# EAGLE board PCA9685Shield (EAGLE 7.3.0)
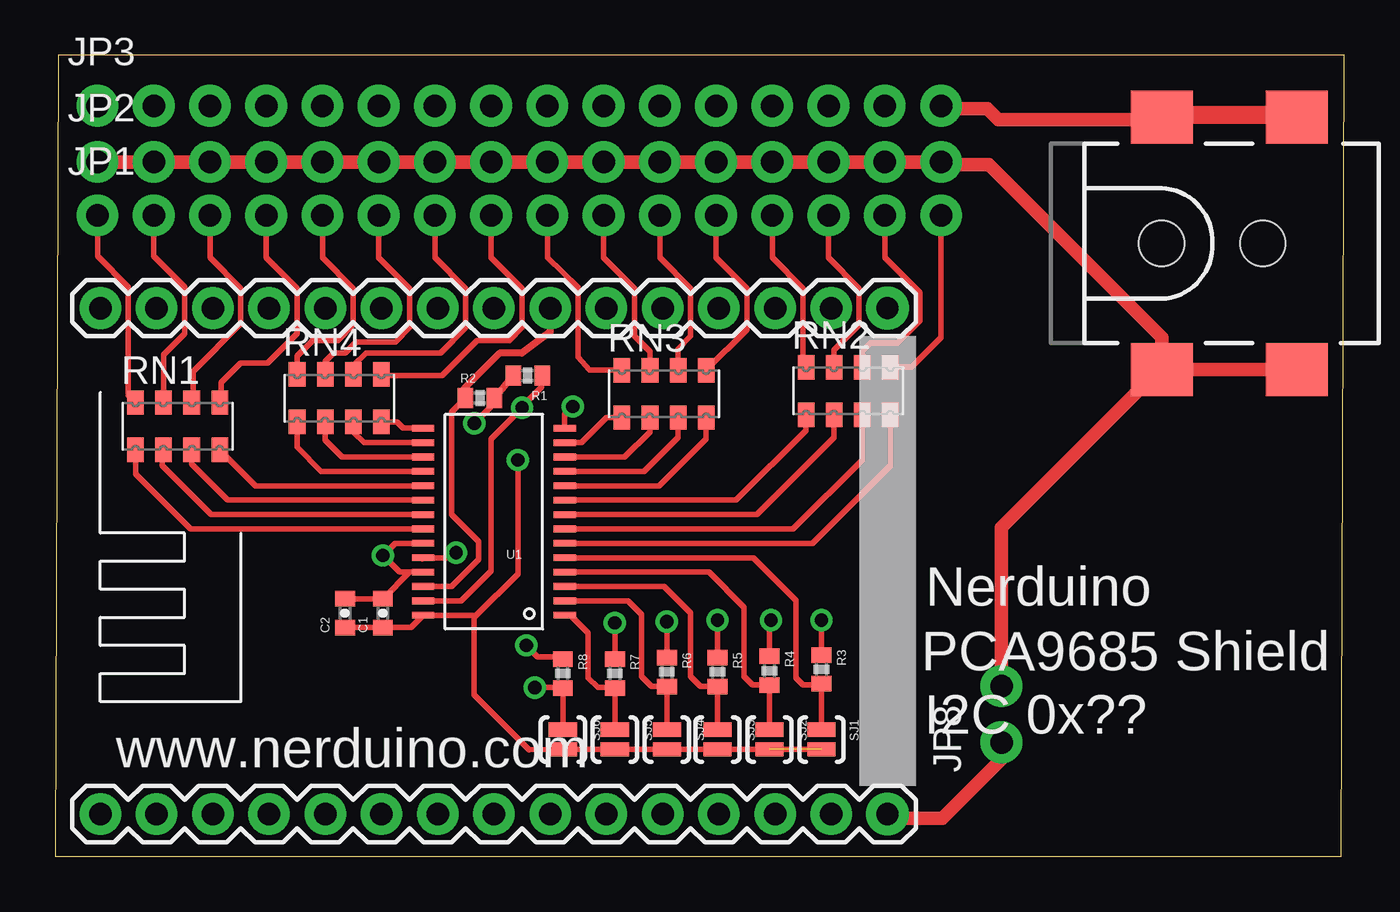
[diagram p0: board, top side]
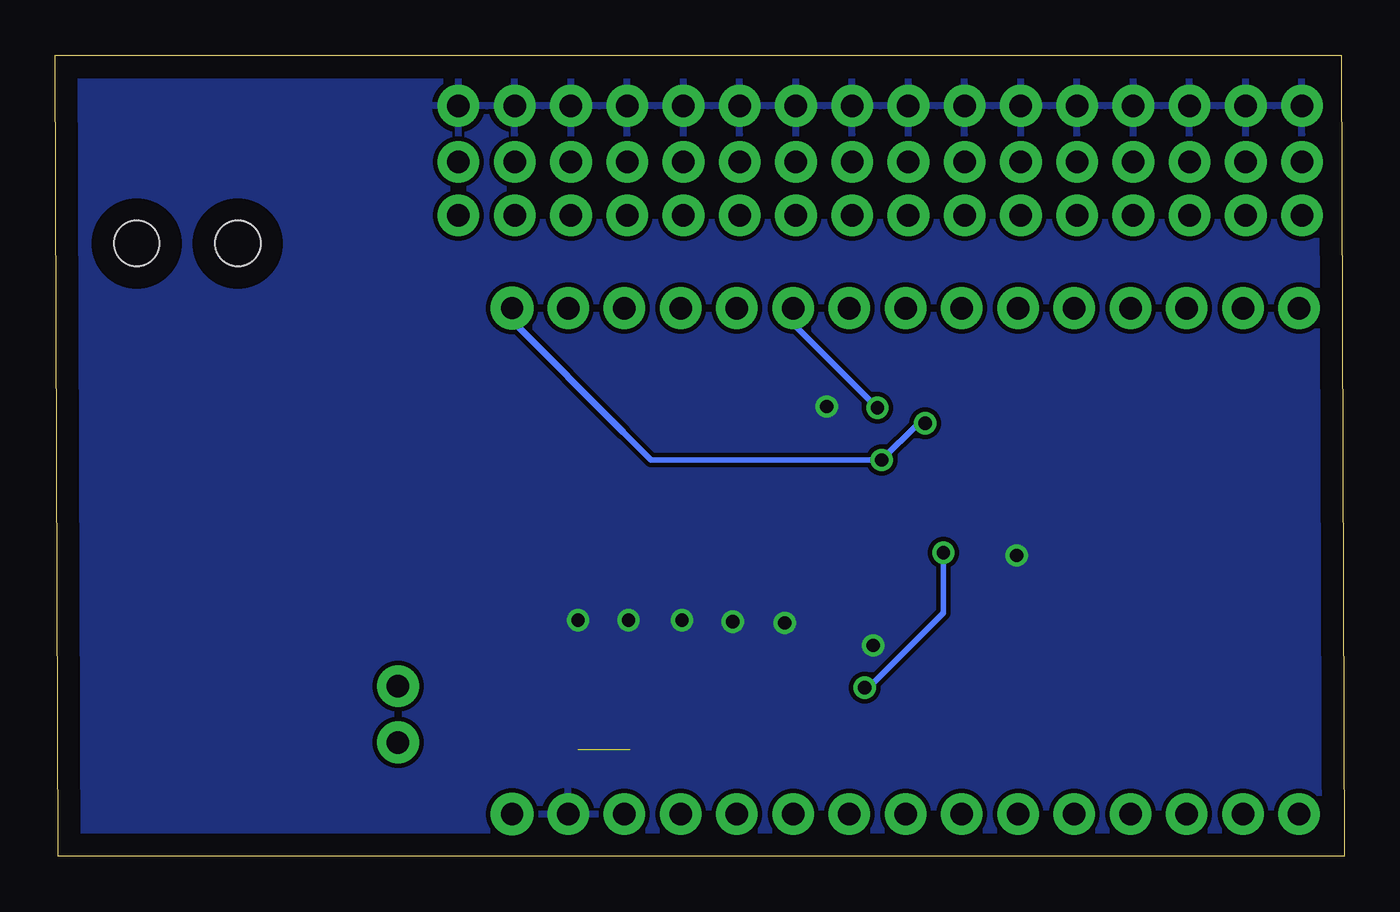
[diagram p1: board, bottom side, seen from below]

Size 58.22 x 36.19 mm. Coordinates in mm from the lower left corner, seen from the top.
Outline: 0,0 58.09,0 58.22,36.19 0.13,36.19 0,0
Copper layers (1*16): Top 0.035mm / dielectric 1.5mm / Bottom 0.035mm
Design rules "default": minimum track width 10mil, minimum drill 24mil, track to track 8mil, track to pad 8mil, pad to pad 8mil, via to via 8mil, smd to smd 8mil, copper to edge 40mil, drill to drill 8mil, minimum pad ring 10mil, minimum via ring 8mil, stop-mask expansion 4mil, vias tented up to drill 0mil, thermal gap 10mil

## Footprints (pad centres in the part's own frame; a part is rotated, then mirrored left to right if it is on the bottom)
0402-CAP = smd 0.7 x 0.9: 1 -0.65,0; 2 0.65,0
1X16_NO_SILK = drill 1.016 pad 1.88: 1 0,0; 2 2.54,0; 3 5.08,0; 4 7.62,0; 5 10.16,0; 6 12.7,0; 7 15.24,0; 8 17.78,0; 9 20.32,0; 10 22.86,0; 11 25.4,0; 12 27.94,0; 13 30.48,0; 14 33.02,0; 15 35.56,0; 16 38.1,0
POWER_JACK_SMD_OVERPASTE_REDBOARD_0603 = smd 2.8 x 2.4: GND 0,-5.7; P$4 6.1,-5.7; VIN0 0,5.7; VIN1 6.1,5.7 | hole 2.032: 0,0; 4.572,0
1X02_NO_SILK = drill 1.016 pad 1.88: 1 0,0; 2 2.54,0
0402-RES = smd 0.7 x 0.9: 1 -0.65,0; 2 0.65,0
EXBS8V = smd 0.75 x 1.1: 1 -1.905,-1.07; 2 -0.635,-1.07; 3 0.635,-1.07; 4 1.905,-1.07; 5 1.905,1.07; 6 0.635,1.07; 7 -0.635,1.07; 8 -1.905,1.07
SJ_2S-NO = smd 0.635 x 1.27: 1 -0.45,0; 2 0.45,0
TSSOP-28_4MM = smd 1 x 0.3: 1 -3.2,4.225; 2 -3.2,3.575; 3 -3.2,2.925; 4 -3.2,2.275; 5 -3.2,1.625; 6 -3.2,0.975; 7 -3.2,0.325; 8 -3.2,-0.325; 9 -3.2,-0.975; 10 -3.2,-1.625; 11 -3.2,-2.275; 12 -3.2,-2.925; 13 -3.2,-3.575; 14 -3.2,-4.225; 15 3.2,-4.225; 16 3.2,-3.575; 17 3.2,-2.925; 18 3.2,-2.275; 19 3.2,-1.625; 20 3.2,-0.975; 21 3.2,-0.325; 22 3.2,0.325; 23 3.2,0.975; 24 3.2,1.625; 25 3.2,2.275; 26 3.2,2.925; 27 3.2,3.575; 28 3.2,4.225
NERDUINO_STACK = drill 1.016 pad 1.88: 1 -17.78,-5.08; 2 -15.24,-5.08; 3 -12.7,-5.08; 4 -10.16,-5.08; 5 -7.62,-5.08; 6 -5.08,-5.08; 7 -2.54,-5.08; 8 0,-5.08; 9 2.54,-5.08; 10 5.08,-5.08; 11 7.62,-5.08; 12 10.16,-5.08; 13 12.7,-5.08; 14 15.24,-5.08; 17 15.24,17.78; 18 12.7,17.78; 19 10.16,17.78; 20 7.62,17.78; 21 5.08,17.78; 22 2.54,17.78; 23 0,17.78; 24 -2.54,17.78; 25 -5.08,17.78; 26 -7.62,17.78; 27 -10.16,17.78; 28 -12.7,17.78; 29 -15.24,17.78; 30 -17.78,17.78 | drill 1 pad 1.93: 15 17.78,-5.08; 16 17.78,17.78

## Placement (x,y rotation side)
C1  0.1uF  [0402-CAP]  14.8,10.99 90 top
C2  1uF  [0402-CAP]  13.08,10.99 90 top
JP1  [1X16_NO_SILK]  1.9,28.96 0 top
JP2  [1X16_NO_SILK]  1.9,31.37 0 top
JP3  [1X16_NO_SILK]  1.9,33.91 0 top
JP7  POWER_JACK1  [POWER_JACK_SMD_OVERPASTE_REDBOARD_0603]  49.97,27.69 0 top
JP8  [1X02_NO_SILK]  42.74,5.14 90 top
R1  4.7k  [0402-RES]  21.34,21.72 180 top
R2  4.7k  [0402-RES]  19.18,20.7 0 top
R3  10k  [0402-RES]  34.61,8.45 270 top
R4  10k  [0402-RES]  32.26,8.38 270 top
R5  10k  [0402-RES]  29.91,8.32 270 top
R6  10k  [0402-RES]  27.62,8.32 270 top
R7  10k  [0402-RES]  25.27,8.26 270 top
R8  10k  [0402-RES]  22.92,8.26 270 top
RN1  220  [EXBS8V]  5.52,19.43 0 top
RN2  220  [EXBS8V]  35.81,21.02 0 top
RN3  220  [EXBS8V]  27.5,20.89 0 top
RN4  220  [EXBS8V]  12.83,20.7 0 top
SJ1  SOLDERJUMPERNO  [SJ_2S-NO]  34.61,5.27 270 top
SJ2  SOLDERJUMPERNO  [SJ_2S-NO]  32.26,5.27 270 top
SJ3  SOLDERJUMPERNO  [SJ_2S-NO]  29.91,5.27 270 top
SJ4  SOLDERJUMPERNO  [SJ_2S-NO]  27.62,5.27 270 top
SJ5  SOLDERJUMPERNO  [SJ_2S-NO]  25.27,5.27 270 top
SJ6  SOLDERJUMPERNO  [SJ_2S-NO]  22.92,5.27 270 top
U1  PCA9685  [TSSOP-28_4MM]  19.81,15.11 180 top
U$1  NERDSHIELD  [NERDUINO_STACK]  19.81,6.99 0 top

## Library data of the parts
C1 C2 JP8 R1-R8 SJ1-SJ6 = SparkFun
JP1-JP3 JP7 = SparkFun-Connectors
RN1-RN4 = resistor-dil; OC_FARNELL: unknown; OC_NEWARK: unknown
U1 = SparkFun-DigitalIC; PROD_ID: IC-12240
U$1 = NerduinoShieldLib

## Nets
3.3V: C1.1 C2.1 R1.2 R2.2 SJ1.2 SJ2.2 SJ3.2 SJ4.2 SJ5.2 SJ6.2 U1.28 U$1.16
GND: C1.2 C2.2 JP3.1 JP3.2 JP3.3 JP3.4 JP3.5 JP3.6 JP3.7 JP3.8 JP3.9 JP3.10 JP3.11 JP3.12 JP3.13 JP3.14 JP3.15 JP3.16 JP7.VIN0 R3.1 R4.1 R5.1 R6.1 R7.1 R8.1 U1.14 U1.23 U1.25 U$1.14
N$1: JP8.1 U$1.15
N$2: R1.1 U1.27 U$1.21
N$3: R7.2 SJ5.1 U1.1
N$4: R6.2 SJ4.1 U1.2
N$5: R5.2 SJ3.1 U1.3
N$6: R4.2 SJ2.1 U1.4
N$8: R2.1 U1.26 U$1.22
N$9: R8.2 SJ6.1 U1.24
N$10: RN2.4 U1.6
N$11: JP1.15 RN2.6
N$12: JP1.14 RN2.7
N$13: JP1.13 RN2.8
N$14: JP1.12 RN3.5
N$15: JP1.11 RN3.6
N$16: JP1.10 RN3.7
N$17: JP1.9 RN3.8
N$18: JP1.8 RN4.5
N$19: JP1.7 RN4.6
N$20: JP1.6 RN4.7
N$21: JP1.5 RN4.8
N$22: JP1.4 RN1.5
N$23: JP1.3 RN1.6
N$24: RN1.2 U1.21
N$25: RN1.1 U1.22
N$26: JP2.1 JP2.2 JP2.3 JP2.4 JP2.5 JP2.6 JP2.7 JP2.8 JP2.9 JP2.10 JP2.11 JP2.12 JP2.13 JP2.14 JP2.15 JP2.16 JP7.P$4 JP8.2
N$27: JP1.2 RN1.7
N$28: JP1.1 RN1.8
N$29: RN1.3 U1.20
N$30: RN1.4 U1.19
N$31: RN4.1 U1.18
N$32: RN4.2 U1.17
N$33: RN4.3 U1.16
N$34: RN4.4 U1.15
N$35: RN3.1 U1.13
N$36: RN3.2 U1.12
N$37: RN3.3 U1.11
N$38: RN3.4 U1.10
N$39: RN2.1 U1.9
N$40: RN2.2 U1.8
N$41: RN2.3 U1.7
N$42: JP1.16 RN2.5
N$43: R3.2 SJ1.1 U1.5

## Tracks (layer width: path | path; a pad name or v marks a point on that pad's centre or on a via)
3.3V  (via drill 0.6)  (1 unrouted)
  Top 0.254: C2.1 C1.1 16.06,10.34 U1.28 19.02,10.89 | 19.02,10.89 20.89,12.76 v20.89,17.91 | R2.2 19.83,20.46 v18.92,19.56 | SJ1.2 SJ3.2 SJ4.2 SJ5.2 SJ6.2 21.41,4.81 18.92,7.29 18.92,10.79 19.02,10.89
  Top 0.305: R1.2 19.86,20.73 R2.2
  Bottom 0.254: v18.92,19.56 19.24,19.56 v20.89,17.91 31.31,17.91 32.58,19.18
  Bottom 0.305: U$1.16 37.59,24.19 32.58,19.18
GND  (via drill 0.6, 0.6 pad 0.3)
  Top 0.254: C2.2 C1.2 16,12.84 | U1.25 16,12.84 | U1.23 15.34,14.14 v14.8,13.59 15.55,12.84 16,12.84 | U1.14 23.01,19.96 v23.37,20.32 | R3.1 v34.61,10.67 | R4.1 32.26,10.6 v32.32,10.67 | R5.1 v29.91,10.67 | R6.1 v27.62,10.6 | R7.1 v25.27,10.54 | R8.1 23,8.9 23.11,9.02 21.78,9.02 v21.27,9.53
  Top 0.61: JP7.VIN0 56.5,33.39 56.71,33.59 50.1,33.59 49.78,33.27 42.61,33.27 42.1,33.78 40.13,33.78 JP3.16
  Bottom 0.254: v14.8,13.59 14.8,13.46 14.92,13.34 | v23.37,20.32 23.37,20.45 | v34.61,10.67 34.67,10.67 | v32.32,10.67 32.32,10.79 32.26,10.86 | v29.91,10.67 29.97,10.67 | v27.62,10.6 27.56,10.54 | v25.27,10.54 25.27,10.6 | v21.27,9.53 21.34,9.53 21.46,9.65
  pour Bottom: 0.89,35.43 57.66,35.43 57.66,0.76 0.89,0.76
N$1
  Top 0.61: JP8.1 42.73,4.38 40.07,1.71 37.78,1.71 U$1.15
N$2  (via drill 0.6)
  Top 0.254: R1.1 21.97,21.7 21.97,21.21 21.08,20.32 v21.08,20.26 19.69,18.86 19.69,12.89 18.33,11.54 U1.27
  Bottom 0.254: U$1.21 24.89,24.07 v21.08,20.26
N$3
  Top 0.254: SJ5.1 R7.2 25.26,7.62 24.51,7.62 24.07,8.06 24.07,10.1 23.28,10.89 U1.1
N$4
  Top 0.254: SJ4.1 R6.2 27.61,7.68 26.92,7.68 26.48,8.13 26.48,10.92 25.86,11.54 U1.2
N$5
  Top 0.254: SJ3.1 R5.2 29.89,7.68 29.15,7.68 28.7,8.13 28.7,10.98 27.5,12.19 U1.3
N$6
  Top 0.254: SJ2.1 R4.2 32.24,7.75 31.5,7.75 31.12,8.13 31.12,11.24 29.52,12.84 U1.4
N$8
  Top 0.254: U1.26 17.9,12.19 19.11,13.4 19.11,14.22 17.91,15.43 17.91,20.08 R2.1
  Top 0.305: U$1.22 22.35,23.68 21.08,22.73 20.07,22.73 18.48,21.14 18.48,20.84 R2.1
N$9  (via drill 0.6 pad 0.3)
  Top 0.254: SJ6.1 R8.2 22.91,7.62 v21.65,7.62 | U1.24 17.87,13.49 v18.1,13.72
  Top 0.305: 16.59,13.46 U1.24
  Bottom 0.254: v18.1,13.72 18.1,10.98 21.46,7.62 v21.65,7.62
N$10
  Top 0.254: U1.6 34.2,14.14 37.72,17.65 RN2.4
N$11
  Top 0.254: JP1.15 37.46,27.05 39.05,25.46 39.05,24.19 38.04,23.18 36.83,23.18 36.45,22.8 RN2.6
N$12
  Top 0.254: JP1.14 34.92,27.05 36.3,25.65 36.3,24 35.18,22.86 RN2.7
N$13
  Top 0.254: JP1.13 32.38,27.05 33.78,25.65 33.78,22.22 RN2.8
N$14
  Top 0.254: JP1.12 29.85,27.05 31.24,25.65 31.24,23.8 RN3.5
N$15
  Top 0.254: JP1.11 27.3,27.05 28.7,25.65 28.7,23.49 28.13,22.92 RN3.6
N$16
  Top 0.254: JP1.10 24.77,27.05 26.16,25.65 26.16,23.49 26.86,22.8 RN3.7
N$17
  Top 0.254: JP1.9 22.23,27.05 23.62,25.72 23.62,22.54 24.13,21.97 25.58,21.97 RN3.8
N$18
  Top 0.254: JP1.8 19.69,27.05 21.08,25.65 21.08,23.88 20.51,23.3 19.05,23.3 17.46,21.72 14.79,21.72 RN4.5
N$19
  Top 0.254: JP1.7 17.14,27.05 18.54,25.65 18.54,23.88 17.4,22.73 14.03,22.73 13.46,22.16 RN4.6
N$20
  Top 0.254: JP1.6 14.61,27.05 16,25.65 16,23.88 15.37,23.24 13.59,23.24 13.08,22.73 12.57,22.73 12.19,22.35 RN4.7
N$21
  Top 0.254: JP1.5 12.07,27.05 13.46,25.65 13.46,24 12.76,23.3 11.62,23.3 10.92,22.61 RN4.8
N$22
  Top 0.254: JP1.4 9.52,27.05 10.92,25.65 10.92,23.62 9.59,22.29 8.38,22.29 7.49,21.4 7.49,20.56 RN1.5
N$23
  Top 0.254: JP1.3 6.99,27.05 8.38,25.65 8.38,24.07 6.22,21.91 6.22,20.56 RN1.6
N$24
  Top 0.254: U1.21 7.04,15.44 4.83,17.65 4.83,18.3 RN1.2
N$25
  Top 0.254: U1.22 6.1,14.79 3.62,17.27 RN1.1
N$26
  Top 0.61: JP7.P$4 50.12,21.99 49.97,21.84 49.97,22.1 | 49.97,22.1 49.97,23.43 42.16,31.24 40.13,31.24 JP2.16 JP2.15 JP2.14 JP2.13 JP2.12 JP2.11 JP2.10 JP2.9 JP2.8 JP2.7 JP2.6 JP2.5 JP2.4 JP2.3 JP2.2 JP2.1 | JP8.2 42.73,14.86 49.97,22.1
N$27
  Top 0.254: JP1.2 4.45,27.11 5.84,25.72 5.84,23.62 4.89,22.67 RN1.7
N$28
  Top 0.254: JP1.1 1.9,27.11 3.3,25.72 3.3,20.82 RN1.8
N$29
  Top 0.254: U1.20 7.79,16.09 6.16,17.72 RN1.3
N$30
  Top 0.254: U1.19 9.05,16.74 RN1.4
N$31
  Top 0.254: U1.18 12.01,17.39 10.92,18.48 RN4.1
N$32
  Top 0.254: U1.17 12.95,18.04 12.19,18.8 RN4.2
N$33
  Top 0.254: U1.16 13.95,18.69 13.46,19.18 RN4.3
N$34
  Top 0.254: U1.15 15.71,19.34 15.43,19.62 14.74,19.62 RN4.4
N$35
  Top 0.254: U1.13 23.77,18.69 24.89,19.81 25.58,19.81 RN3.1
N$36
  Top 0.254: U1.12 25.72,18.04 26.86,19.18 RN3.2
N$37
  Top 0.254: U1.11 26.6,17.39 28.13,18.92 RN3.3
N$38
  Top 0.254: U1.10 27.28,16.74 29.4,18.86 RN3.4
N$39
  Top 0.254: U1.9 30.76,16.09 33.91,19.24 RN2.1
N$40
  Top 0.254: U1.8 31.69,15.44 35.18,18.92 RN2.2
N$41
  Top 0.254: U1.7 33.33,14.79 36.45,17.91 RN2.3
N$42
  Top 0.254: JP1.16 40,23.43 38.67,22.1 37.73,22.1 RN2.5
N$43
  Top 0.254: SJ1.1 R3.2 34.56,7.75 33.78,7.75 33.46,8.06 33.46,11.56 31.53,13.49 U1.5

## Text on the board
_tsilk: Nerduino | PCA9685 Shield | I2C 0x?? | www.nerduino.com